# Altium PCB module.PcbDoc
Units mm, origin at the board's own origin, x right, y up, seen from the top; angles counter-clockwise.
Board outline 43.95 x 15 mm, 2 copper layers (Top Layer, Bottom Layer), stack 0.871 mm thick; 26 components, 18 nets, 109 pads, 126 vias.
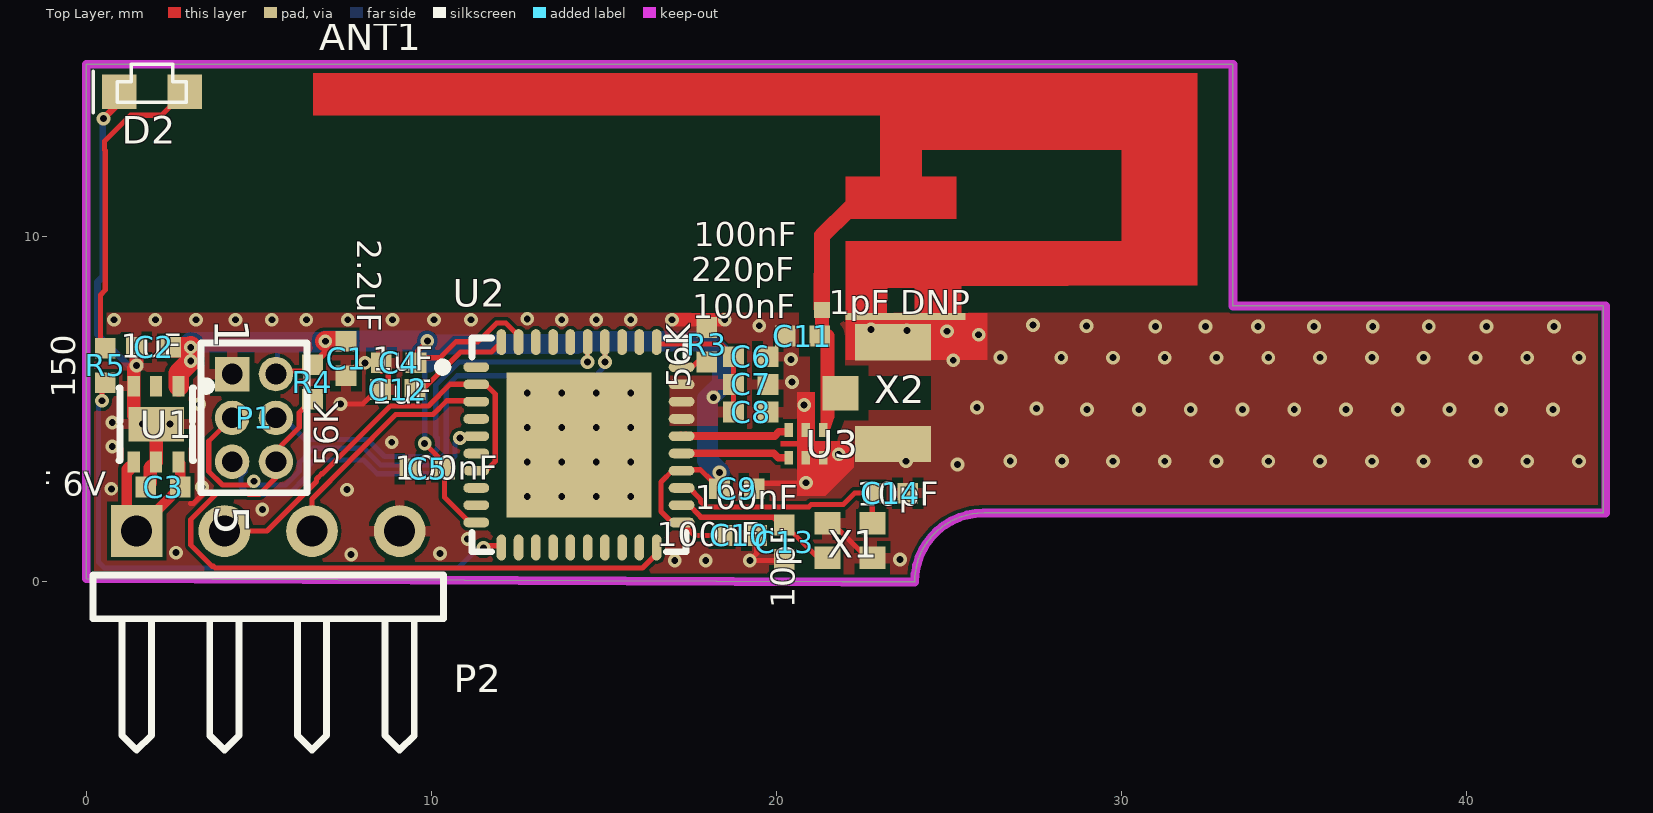
[diagram p0: Top Layer view]
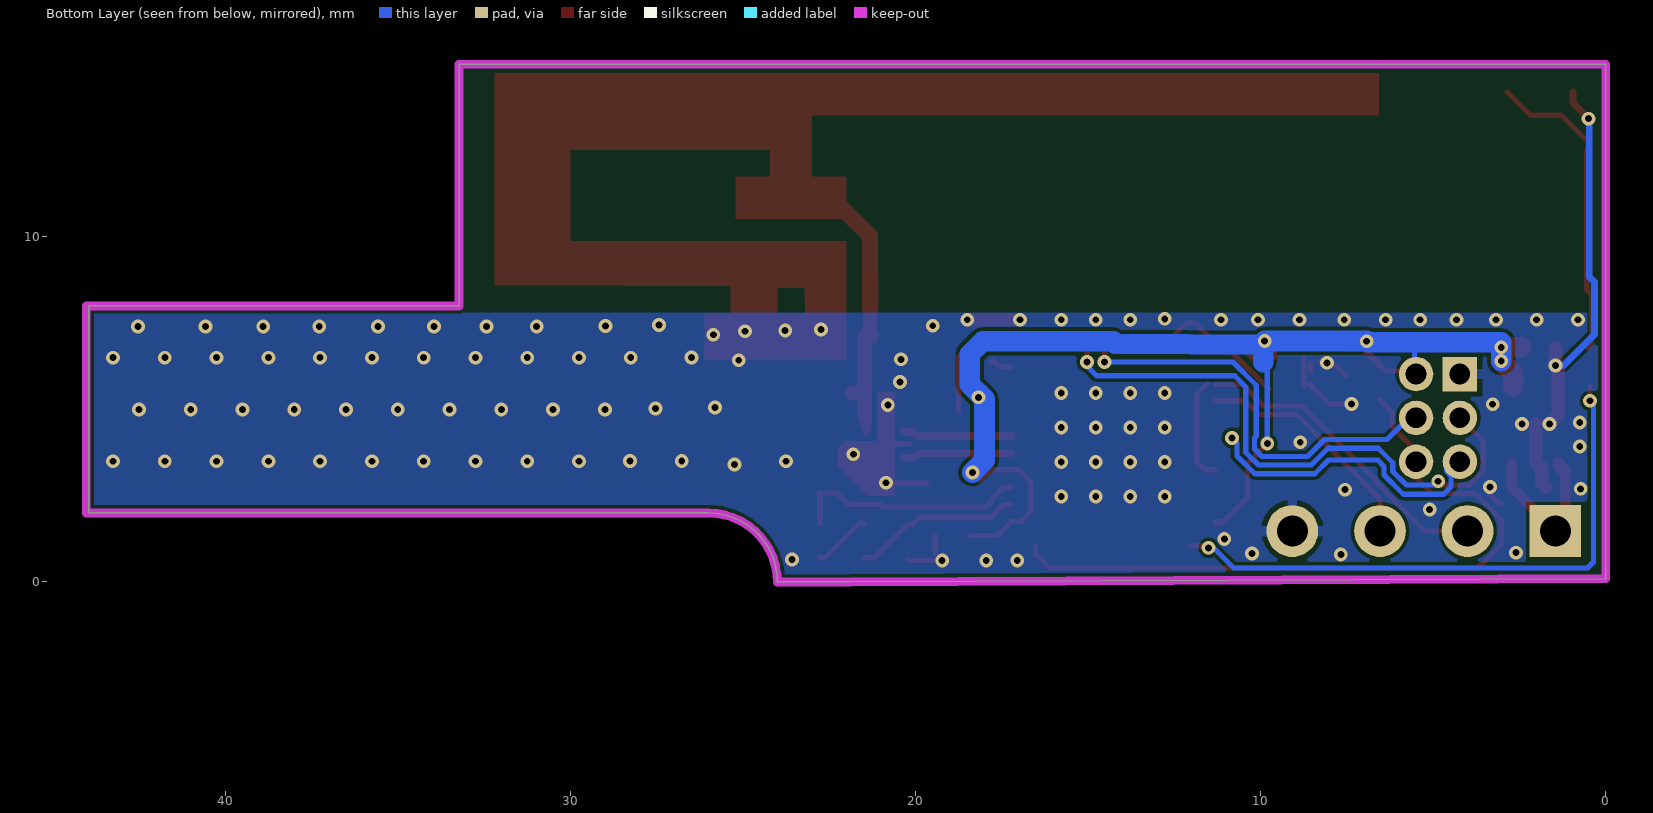
[diagram p1: Bottom Layer view, seen from below]

## Layer stack, top to bottom
Top Solder: solder mask 0.0102, Solder Resist, Dk 3.5
Top Layer: signal copper 0.0356
Dielectric1: core 0.8, FR-4, Dk 4.8
Bottom Layer: signal copper 0.0356
Bottom Solder: solder mask 0.0102, Solder Resist, Dk 3.5

## Board outline
0,0.1 21.9,0 24,0 cw(c26,0) 26,2 43.95,2 43.95,8 33.223,8 33.223,15 0,15

## Design rules (kind name [scope] priority, off if disabled: settings)
AcuteAngle [All] p1 off: minimum=8.80000000000000E+0001 checktracksonly=FALSE
Clearance Clearance_cc2533 [(InNet('GND') AND IsRegion) vs (HasFootprint('QFN50P600X600X100-40L-2') AND InNet('GND'))] p1: gap=1 ignorepadtopadclearanceinfootprint=FALSE except(0: Arc-Hole Track-Hole SMDPad-Hole THPad-Hole Via-Hole Fill-Hole Poly-Hole Region-Hole Text-Hole)
Clearance rfnet [InNet('NetR1_1')   Or InNet('NetANT1_2') vs (InNet('GND') AND NOT HasFootprint('LFB182G45BG2D280'))] p2: gap=0.3 ignorepadtopadclearanceinfootprint=FALSE except(0: Arc-Hole Track-Hole SMDPad-Hole THPad-Hole Via-Hole Fill-Hole Poly-Hole Region-Hole Text-Hole)
Clearance Clearance_balun [HasFootprint('LFB182G45BG2D280')] p3: gap=0.124 ignorepadtopadclearanceinfootprint=FALSE except(0: Arc-Hole Track-Hole SMDPad-Hole THPad-Hole Via-Hole Fill-Hole Poly-Hole Region-Hole Text-Hole)
Clearance Clearance_Ant [(ObjectKind = 'Pad') And (Component = 'ANT1') vs (OnLayer('Keep-Out Layer'))] p4: gap=0 ignorepadtopadclearanceinfootprint=FALSE
Clearance Clearance_Normal [All] p5: gap=0.1 ignorepadtopadclearanceinfootprint=FALSE except(0: Arc-Hole Track-Hole SMDPad-Hole THPad-Hole Via-Hole Fill-Hole Poly-Hole Region-Hole Text-Hole)
ComponentClearance prog_connector [InComponent('P1')] p1: gap=-10 collisioncheckmode=3 verticalgap=-10 showdistances=FALSE
ComponentClearance [All] p2: gap=0.15 collisioncheckmode=3 verticalgap=0.15 showdistances=FALSE
DiffPairsRouting [All] p1: maxlimit=0.254 minlimit=0.254 mostfreqgap=0.254 toplayer_minwidth=0.381 toplayer_maxwidth=0.381 toplayer_prefwidth=0.381 bottomlayer_minwidth=0.381 bottomlayer_maxwidth=0.381 bottomlayer_prefwidth=0.381 maxuncoupledlength=12.7
FabricationTestPointUsage TestPointUsage [All] p1: valid=0 allowmultiple=FALSE
FabricationTestpoint Testpoint [All] p1: side=3 testpointundercomponent=TRUE minsize=1.016 maxsize=2.54 preferedsize=1.524 minholesize=0 maxholesize=1.016 preferedholesize=0.813 testpointgrid=0.025 allowsidetop=TRUE allowsidebottom=TRUE usegrid=TRUE gridtolerance=0
Height [All] p1 off: minheight=0 maxheight=25.4 prefheight=12.7
HoleSize [All] p1: absolutevalues=TRUE maxlimit=6 minlimit=0.2 maxpercent=80.000 minpercent=20.000
MinimumAnnularRing [All] p1: minimumring=0.1
MinimumSolderMaskSliver [All] p1: minsoldermaskwidth=0.2
NetAntennae [All] p1: netantennaetolerance=1
PasteMaskExpansion [All] p1: expansion=-0.05
PlaneClearance [All] p1: clearance=0.3
PlaneConnect [All] p1: planeconnectstyle=Direct reliefexpansion=0.508 reliefentries=4 reliefconductorwidth=0.2 reliefairgap=0.254
PolygonConnect capa-rf [InComponent('C11')] p1: connectstyle=Direct reliefconductorwidth=0.254 reliefentries=4 polygonreliefangle="90 Angle" airgapwidth=0.254
PolygonConnect UFL-connect [HasFootprint('U.FL-R-SMT-1')] p2: connectstyle=Direct reliefconductorwidth=0.254 reliefentries=4 polygonreliefangle="90 Angle" airgapwidth=0.254
PolygonConnect [HasFootprint('QFN50P600X600X100-40L-2')] p3: connectstyle=Direct reliefconductorwidth=0.6 reliefentries=4 polygonreliefangle="90 Angle" airgapwidth=0.1
PolygonConnect ant-connect [InComponent('ANT1')] p4: connectstyle=Direct reliefconductorwidth=0.2 reliefentries=4 polygonreliefangle="90 Angle" airgapwidth=0.254
PolygonConnect PolygonConnect_Via [IsVia] p5: connectstyle=Direct reliefconductorwidth=0.254 reliefentries=4 polygonreliefangle="90 Angle" airgapwidth=0.254
PolygonConnect PolygonConnect_1 [All] p6: connectstyle=Relief reliefconductorwidth=0.3 reliefentries=4 polygonreliefangle="90 Angle" airgapwidth=0.15
RoutingCorners [All] p1: cornerstyle=45-Degree minsetback=1 maxsetback=2.54
RoutingVias [All] p1: holewidth=0.3 width=0.6 viastyle="Through Hole" minholewidth=0.2 minwidth=0.4 maxholewidth=1 maxwidth=4
SMDToCorner [All] p1 off: distance=78740
SMDToPlane [All] p1 off: distance=118110
SilkToSilkClearance [All] p1: silktosilkclearance=0.2
SilkToSolderMaskClearance SilkscreenOverComponentPads [IsPad] p1: minsilkscreentomaskgap=0.2 clearancetoexposedcopper=TRUE
SolderMaskExpansion SolderMaskExpansion_Via [isVia] p1: expansion=-5
SolderMaskExpansion [All] p2: expansion=0.05
ViasUnderSMD [All] p1: allowed=TRUE
Width [All] p1: maxlimit=5 minlimit=0.15 preferedwidth=0.2 minimp=50.000000 maximp=50.000000 favimp=50.000000
16 further rules are at their usual default settings.

## Classes and differential pairs
differential pair RF: +RF_P -RF_N

## Components (designator, comment, footprint, x,y, rotation, side; value= is the part's Value field where it differs from the comment)
ANT1 "Inverted F Antenna" IFA_2 22,7.531 r180 top net-tie
C1 "2.2uF" CAPC1005X05L 7.525,6.475 r270 top
C2 "1uF" CAPC1005X05L 1.95,6.8 r180 top
C3 "1uF 6V" CAPC1005X05L 2.225,2.75 r180 top
C4 "1uF" CAPC1005X05L 9.05,6.35 r180 top
C5 "100nF" CAPC1005X05L 9.881,3.277 r180 top
C6 "100nF" CAPC1005X05L 19.25,6.525 r0 top
C7 "220pF" CAPC1005X05L 19.25,5.725 r0 top
C8 "100nF" CAPC1005X05L 19.25,4.925 r0 top
C9 "100nF" CAPC1005X05L 18.85,2.7 r0 top
C10 "100nF" CAPC1005X05L 18.925,1.35 r0 top
C11 "1pF DNP" CAPC1005X05L 20.75,7.125 r180 top
C12 "1uF" CAPC1005X05L 9.025,5.575 r180 top
C13 "10pF" CAPC1005X05L 20.225,1.15 r270 top
C14 "10pF" CAPC1005X05L 23.3,2.575 r0 top
D2 "27-21SURC/S530-A3" Led-side 1.9,14.2 r0 top
P1 "MHDR2X3" MHDR2X3 4.225,6.025 r270 top
P2 "Header 4H" HDR1X4H 1.46,1.475 r0 top
R3 "56K" RESC1005X04L 17.975,6.875 r270 top
R4 "56K" RESC1005X04L 6.553,5.791 r90 top
R5 "150" RESC1005X04L 0.55,6.275 r270 top
U1 "TPS781330220DRVR" QFN65P200X200X80-6N 2.025,4.575 r180 top
U2 "CC2533F96RHA" QFN50P600X600X100-40L-2 14.275,3.975 r0 top
U3 "LFB182G45BG2D280" LFB182G45BG2D280 20.85,4 r0 top
X1 "ABM11-32.000MHZ-B7G-T" Abracon-ABM11 22.775,1.7 r0 top
X2 "UFL" U.FL-R-SMT-1 23.375,5.475 r270 top

## Footprints (in the part's own frame and the unit in brackets; to place one, negate y for a bottom-side part, rotate by r counter-clockwise, add the part's x,y. Pads: shape width x height; smd on the part's side, far side on the other; paste and mask are expansions set on the pad)
Abracon-ABM11 [mm]
  rect 0.75x0.65 smd: 0(-1.3,0) 0(0,-1) 1(-1.3,-1) 2(0,0)
  body extent -1.65,-1.3 0.35,0.3, height 0.59
CAPC1005X05L [mm]
  rect 0.6x0.6 smd: 1(-0.5,0) 2(0.5,0)
  body extent -0.55,-0.3 0.55,0.3, height 0.6
HDR1X4H [mm] "Connector; Header; 4 Position; Right Angle"
  rect 1.5x1.5 hole 0.9: 1(0,0)
  round 1.5 hole 0.9: 2(2.54,0) 3(5.08,0) 4(7.62,0)
  silkscreen extent -1.27,-6.35 8.89,-1.27, body extent -1.4,-4.65 9.02,0.4, height 3.54
IFA_2 [mm]
  rect 0.46x0.46 smd paste-1000 mask-1000: 1(0.684,-0.347)
  rect 3.48x0.2 smd paste-2539.97 mask-2539.97: 2(-1.738,-0.165)
  Top Layer region: -3.353,-0.23 -3.356,-1.042 -9.552,-1.067 -10.187,-1.067 -10.188,-1.067 -10.188,-1.067 -10.189,-1.068 -10.189,-1.068 -10.189,-1.068 -10.189,-7.215 -10.189,-7.216 -10.188,-7.216 -10.188,-7.217 -10.187,-7.217 -10.187,-7.217 15.416,-7.217 15.417,-7.217 15.417,-7.216 15.418,-7.216 15.418,-7.215 15.418,-7.215 15.418,-6.002 15.418,-6.001 15.417,-6 15.417,-6 15.416,-6 15.416,-6 -1,-6 -1,-4.207 -0.002,-4.207 -0.001,-4.206 0,-4.206 0,-4.206 0,-4.205 0,-4.205 0,-3.507 0.846,-2.661 0.897,-2.586 0.914,-2.498 0.914,-2.498 0.915,-0.36 0.892,-0.26 0.828,-0.18 0.736,-0.135 0.634,-0.135 0.541,-0.18 0.477,-0.26 0.455,-0.36 0.455,-0.36 0.454,-2.402 0.446,-2.41 -0.144,-3 -3.205,-3 -3.206,-3 -3.206,-3 -3.206,-3.001 -3.207,-3.002 -3.207,-3.002 -3.207,-4.205 -3.206,-4.206 -3.206,-4.206 -3.206,-4.206 -3.205,-4.207 -3.205,-4.207 -2.207,-4.207 -2.207,-5 -8,-5 -8,-2.34 -0.002,-2.34 -0.001,-2.34 0,-2.34 0,-2.339 0,-2.338 0,-2.338 0,-0.103 0,-0.103 0,-0.102 -0.001,-0.102 -0.002,-0.102 -0.002,-0.102 -0.102,-0.102 -0.101,-0.23 -0.101,-0.229 -0.102,-0.229 -0.102,-0.228 -0.103,-0.228 -0.103,-0.228 -1.193,-0.228 -1.193,-0.228 -1.194,-0.229 -1.194,-0.229 -1.194,-0.23 -1.194,-0.23 -1.207,-1 -2,-1 -2.006,-0.23 -2.006,-0.229 -2.007,-0.229 -2.007,-0.228 -2.008,-0.228 -2.008,-0.228 -2.692,-0.229 -3.352,-0.228 -3.352,-0.228 -3.353,-0.229 -3.353,-0.229 -3.353,-0.23
Led-side [mm]
  rect 1x1 smd: 1(-0.95,0) 2(0.95,0)
  silkscreen extent -1.7,-0.6 1,0.8, body extent -0.9,-0.3 0.9,0.8, height 0.55
LFB182G45BG2D280 [mm] "Murata Balun"
  rect 0.25x0.4 smd mask+0: 1(0.5,0.4) 2(0,0.4) 3(-0.5,0.4) 4(-0.5,-0.4) 5(0,-0.4) 6(0.5,-0.4)
  Top Layer region: -0.724,0.075 1.202,0.075 1.382,-0.106 1.382,-0.677 -0.215,-0.677 -0.236,-0.664 -0.251,-0.641 -0.251,-0.15 -0.251,-0.069 -0.333,-0.067 -0.721,-0.067
  Top Layer region: -0.25,1.499 -0.25,0.027 -0.236,0.013 0.242,0.013 0.25,0.021 0.25,1.499 0.251,1.5
  Top Layer region: -0.251,-0.395 -0.251,-1.5 -0.25,-1.5 -0.249,-1.498 0.561,-1.498 1.382,-0.677
  body extent -0.85,-0.45 0.85,0.45, height 0.7
MHDR2X3 [mm] "Connector; Header; 3x2 Position"
  rect 1x1 hole 0.6: 1(0,0)
  round 1 hole 0.6: 2(0,1.27) 3(1.27,0) 4(1.27,1.27) 5(2.54,0) 6(2.54,1.27)
  silkscreen extent -0.9,-0.9 3.44,2.17
QFN50P600X600X100-40L-2 [mm] "QFN, 40-Leads, Body 6.2x6.2mm (max), Pitch 0.50mm, IPC High Density"
  rect 4.2x4.2 smd paste-1.5 mask+0: 0(0,0)
  oval 0.75x0.28 smd paste-0.025 mask+0.05: 1(-2.975,2.25) 2(-2.975,1.75) 3(-2.975,1.25) 4(-2.975,0.75) 5(-2.975,0.25) 6(-2.975,-0.25) 7(-2.975,-0.75) 8(-2.975,-1.25) 9(-2.975,-1.75) 10(-2.975,-2.25) 21(2.975,-2.25) 22(2.975,-1.75) 23(2.975,-1.25) 24(2.975,-0.75) 25(2.975,-0.25) 26(2.975,0.25) 27(2.975,0.75) 28(2.975,1.25) 29(2.975,1.75) 30(2.975,2.25)
  oval 0.28x0.75 smd paste-0.025 mask+0.05: 11(-2.25,-2.975) 12(-1.75,-2.975) 13(-1.25,-2.975) 14(-0.75,-2.975) 15(-0.25,-2.975) 16(0.25,-2.975) 17(0.75,-2.975) 18(1.25,-2.975) 19(1.75,-2.975) 20(2.25,-2.975) 31(2.25,2.975) 32(1.75,2.975) 33(1.25,2.975) 34(0.75,2.975) 35(0.25,2.975) 36(-0.25,2.975) 37(-0.75,2.975) 38(-1.25,2.975) 39(-1.75,2.975) 40(-2.25,2.975)
  silkscreen extent -4.07,-3.1 3.1,3.1, body extent -3.08,-3.08 3.08,3.08, height 1
QFN65P200X200X80-6N [mm] "QFN, 6-Leads, Body 2.1x2.1mm (max), Pitch 0.65mm, IPC Medium Density"
  rect 0.35x0.6 smd paste-0.05 mask+0.07: 1(-0.65,-1.1) 2(0,-1.1) 3(0.65,-1.1) 4(0.65,1.1) 5(0,1.1) 6(-0.65,1.1)
  rect 1.6x1 smd paste-0.1: 7(0,0)
  silkscreen extent -1.58,-1.22 1.07,1.05, body extent -1.05,-1.05 1.05,1.05, height 0.8
RESC1005X04L [mm] "Chip Resistor, Body 1.1x0.5mm, IPC High Density, EIA 0402"
  rect 0.6x0.6 smd: 1(-0.5,0) 2(0.5,0)
  body extent -0.55,-0.3 0.55,0.3, height 0.4
U.FL-R-SMT-1 [mm]
  rect 1.05x2.2 smd paste-5: 0(-1.475,0) 0(1.475,0)
  rect 1x1.05 smd paste-5: 1(0,-1.525)
  body extent -1.5,-1.5 1.49,1.51, height 1.25

## Part data
ANT1: library part PIF_Antenna
C1: library part 220nF[[/\]]0603[[/\]]1, "Capacitor"
C2 C3 C4 C12: library part 1uF[[/\]]0402[[/\]]1, "Capacitor"
C5 C6 C7 C8 C9 C10: library part 100nF[[/\]]0402[[/\]]1, "Capacitor"
C11 C13 C14: library part 15pF[[/\]]0402[[/\]]1, "Capacitor"
D2: library part LED, "SMD Red led right angle mount 2V@20ma 57mcd"
P1: "Header, 3-Pin, Dual row"
P2: "Header, 4-Pin, Right Angle"
R3 R4 R5: library part 0R[[/\]]0402[[/\]]1, "Resistor"
U1: library part TPS781, "150mA LDO TI"
U2: library part cc2533, "A True System-on-Chip Solution for 2.4-GHz IEEE 802.15.4"
U3: library part 2450BM15A0002, "Balun for CC253x"
X1: "32Mhz Crystal, 15ppm"
X2: library part U.FL-R-SMT-1

## Via types
v1: diameter 0.4, hole 0.2, Top Layer to Bottom Layer, tented both sides, 110 vias
v2: diameter 0.4, hole 0.2, Top Layer to Bottom Layer, tented bottom, 16 vias

## Nets (pads, with @x,y where several pads share a name; then routed paths per layer and width w, separated by ;. In a path a pad name is that pad's centre, name@x,y a point inside that pad or via, vN(x,y) a via of type N, cw(c..) or ccw(c..) an arc to the next point about the centre after c; other vN are vias at no path point)
3.3V: C1.1 C2.1 C4.1 C5.1 C6.1 C7.1 C8.1 C9.1 C10.1 P1.2 R4.2 U1.1 U2.10 U2.21 U2.24 U2.27 U2.28 U2.29 U2.31 U2.39 | length 43.5
  Top Layer w0.15: P1.2@5.537,6.198 5.621,6.113 6.375,6.113 R4.2 ; C4.1@9.593,6.502 9.593,6.698 v1(9.881,6.985) ; C4.1@9.75,6.5 10.251,6.5 10.714,6.963 11.318,6.963 11.335,6.98 ; v1(9.804,4.013) 10.381,3.437 C5.1 10.381,2.454 11.105,1.73 U2.10@11.325,1.73 ; U2.10@11.325,1.74 11.13,1.74 11.12,1.75 U2.10@11.325,1.75 ; 11.353,6.963 11.895,7.505 12.155,7.505 12.525,7.135 12.525,6.955 U2.39 ; U2.31@16.525,6.93 16.555,6.9 18.375,6.9 C6.1 C7.1 C8.1 ; C9.1@18.112,2.937 17.8,3.25 17.005,3.25 16.65,2.895 16.65,2.044 16.944,1.75 17.225,1.75 U2.21 17.625,1.35 C10.1
  Top Layer w0.2: R4.2 6.925,6.663 v1(6.925,6.975)
  Top Layer w0.6: C2.1 v1(3.025,6.8) v1@3.025,6.825 ; U1.1 2.675,6.05 v1(3.025,6.4) ; v1(6.925,6.975) C1.1
  Bottom Layer w0.15: P1.2@5.537,6.198 5.537,6.95 ; v1@9.779,4.115 9.804,4.14 9.804,6.383 9.847,6.426
  Bottom Layer w0.6: v1(3.025,6.4) v1(3.025,6.8) ; v1@3.025,6.95 5.537,6.95 6.9,6.95 v1(6.925,6.975) ; v1@6.925,6.985 v1(9.881,6.985) v1@9.891,6.975 ; 9.925,6.375 9.925,6.875 9.881,6.875 14.201,6.9 ; 14.277,6.975 18.048,6.975 18.426,6.597 18.426,5.726 18,5.3 18,3.525 v1(18.35,3.175)
  other v1: 18.176,5.35
DBG_C: P1.3 U2.34 | length 17.3
  Top Layer w0.15: P1.3 3.55,4.08 3.55,3.205 3.945,2.81 4.743,2.81 v1(4.853,2.92) ; v1(15.026,6.375) U2.34@15.025,6.93
  Bottom Layer w0.15: v1(4.853,2.92) 4.963,2.81 5.775,2.81 6.17,3.205 6.17,3.453 6.592,3.875 8.046,3.875 8.533,3.388 10.063,3.388 10.429,3.754 10.429,5.654 10.75,5.975 14.75,5.975 15.026,6.251 v1(15.026,6.375)
DBG_D: P1.4 U2.35 | length 12.4
  Top Layer w0.15: v1@14.525,6.345 U2.35 U2.35@14.525,6.955
  Bottom Layer w0.15: P1.4@5.537,4.928 6.34,4.125 8.15,4.125 8.637,3.638 9.96,3.638 10.179,3.858 10.179,4.169 10.125,4.223 10.125,5.704 10.796,6.374 v1(14.526,6.375)
GND: ANT1.2 C1.2 C2.2 C3.2 C4.2 C5.2 C6.2 C7.2 C8.2 C9.2 C10.2 C11.2 C12.2 C13.2 C14.2 D2.1 P1.1 P2.4 R3.1 U1.3 U1.5 U1.7 U2.0 U3.2 U3.5 U3.6 X1.0 X2.0 | length 23.8
  Top Layer w0.15: 3.025,2.275 3.097,2.275 3.35,2.528 v1(3.35,2.75) ; v1(7.366,5.156) 8.009,5.156 C12.2@8.593,5.74 ; C1.2 7.9,6.35 v1(8.075,6.35) 8.025,6.4 8.275,6.4 C4.2@8.279,6.396 ; C4.2@8.55,6.101 C4.2 ; C12.2@8.75,5.675 C4.2@8.75,6.5 ; C10.2 19.425,0.825 19.228,0.628 19.228,0.686 19.225,0.683 v1(19.225,0.625) 20.2,0.625 C13.2 ; 19.663,2.862 21.222,2.862 ; X1.0@21.475,1.7 21.625,1.7 22.625,0.7 X1.0@22.775,0.7
  Top Layer w0.2: v1(0.5,13.425) 0.95,13.875 D2.1
  Top Layer w0.4: C2.2 v1(1.45,6.275) 1.375,6.2 U1.3 1.375,4.825 v1(1.625,4.575) ; C3.2 1.85,2.875 1.85,3.3 U1.5 U1.7 ; v1(16.975,7.6) v1(18.5,7.6)
  Bottom Layer w0.2: v1(0.5,13.425) 0.475,13.4 0.475,8.841 0.327,8.693 0.327,7.173 1.225,6.275
  other v1: 17.05,0.625 17.95,0.625 23.575,0.65 7.675,0.8 10.25,0.825 2.6,0.85 11.05,1.25 5.1,2.1 7.55,2.675 0.725,2.7 20.85,2.875 25.248,3.404 23.75,3.5 29.75,3.5 31.25,3.5 32.75,3.5 34.25,3.5 35.75,3.5 37.25,3.5 38.75,3.5 40.25,3.5 41.75,3.5 43.25,3.5 26.772,3.505 28.27,3.505 21.8,3.7 0.75,3.925 8.85,4.05 2.425,4.575 0.75,4.625 29,5 30.5,5 32,5 33.5,5 35,5 36.5,5 38,5 39.5,5 41,5 42.5,5 27.534,5.029 25.806,5.055 20.801,5.125 3.275,5.15 20.447,5.791 25.121,6.426 20.422,6.452 28.25,6.5 29.75,6.5 31.25,6.5 32.75,6.5 34.25,6.5 35.75,6.5 37.25,6.5 38.75,6.5 40.25,6.5 41.75,6.5 43.25,6.5 26.492,6.502 25.857,7.163 24.943,7.264 23.774,7.29 22.733,7.315 30.975,7.4 32.425,7.4 33.95,7.4 35.575,7.4 37.275,7.4 38.9,7.4 40.575,7.4 42.525,7.4 19.5,7.425 28.981,7.417 27.432,7.442 0.8,7.6 2,7.6 3.175,7.6 4.325,7.6 5.375,7.6 6.375,7.6 7.575,7.6 8.875,7.6 10.075,7.6 11.15,7.6 13.775,7.6 14.775,7.6 15.775,7.6 12.775,7.625
  other v2: 12.775,2.475 13.775,2.475 14.775,2.475 15.775,2.475 12.775,3.475 13.775,3.475 14.775,3.475 15.775,3.475 12.775,4.475 13.775,4.475 14.775,4.475 15.775,4.475 12.775,5.475 13.775,5.475 14.775,5.475 15.775,5.475
LED0: R5.2 U2.11 | length 17.1
  Top Layer w0.15: v1(0.45,5.25) R5.2@0.45,5.675 ; v1(11.506,0.991) 11.506,1.05 U2.11@12.025,1.05
  Bottom Layer w0.15: v1(0.45,5.25) 0.35,5.15 0.35,0.575 0.522,0.403 10.778,0.403 v1@11.425,1.05
NetANT1_2: ANT1.1 C11.1 U3.1 X2.1 | length 3.7
  Top Layer w0.4: C11.1 C11.1@21.316,7.125 ; ANT1.1 C11.1@21.316,7.125 ; X2.1@21.474,5.475 21.474,7.125 C11.1@21.316,7.125 ; 21.475,4.8 21.475,5.475 X2.1
NetC12_1: C12.1 U2.40 | length 2.8
  Top Layer w0.15: C12.1@9.765,5.59 10.838,6.663 11.738,6.663 U2.40
NetC13_1: C13.1 U2.22 X1.1 | length 4.9
  Top Layer w0.15: U2.22@17.225,2.25 17.445,2.25 17.8,1.895 17.8,1.875 19.893,1.875 20.093,1.675 20.225,1.675 21.2,0.7 X1.1
NetC14_1: C14.1 U2.23 X1.2 | length 6.9
  Top Layer w0.15: U2.23@17.225,2.75 17.445,2.75 17.8,2.395 17.8,2.332 17.957,2.175 20.932,2.175 21.007,2.25 21.943,2.25 22.268,2.575 C14.1 22.775,2.55 X1.2
NetD2_2: D2.2 R5.1 | length 9
  Top Layer w0.15: R5.1@0.5,6.775 0.406,6.869 0.406,8.314 0.55,8.458 0.55,12.506 0.531,12.525 0.531,12.588 0.531,12.712 0.531,12.775 1.281,13.525 2.175,13.525 D2.2
NetR3_2: R3.2 U2.30 | length 0.7
  Top Layer w0.15: U2.30@17.225,6.23 17.555,6.23 17.75,6.425 R3.2@17.826,6.349
RESET: P1.6 R4.1 U2.20 | length 20.7
  Top Layer w0.15: R4.1 6.17,4.908 6.17,4.475 5.495,3.8 P1.6 5.495,3.031 5.009,2.545 4.698,2.545 4.683,2.56 3.777,2.56 3.025,1.808 3.025,1.071 3.639,0.457 3.683,0.457 3.738,0.403 16.118,0.403 16.525,0.81 U2.20@16.525,1.03
  Bottom Layer w0.15: P1.6@5.537,3.658 P1.6@5.537,3.74
RF_N: U2.26 U3.3 | length 3.2
  Top Layer w0.22: U2.26@17.225,4.23 17.367,4.23 19.951,4.23 20.071,4.35 20.3,4.35 U3.3
  Top Layer w0.25: U2.26@17.225,4.225 U2.26@17.225,4.23 ; U2.26@17.367,4.23 U2.26@17.373,4.236
RF_P: U2.25 U3.4 | length 3.2
  Top Layer w0.22: U2.25@17.225,3.73 17.23,3.735 19.915,3.735 20.05,3.6 U3.4
SCL: P2.2 U2.2 U2.7 | length 12.1
  Top Layer w0.15: P2.2 5.232,1.475 6.67,2.913 6.67,2.984 6.823,3.137 6.844,3.137 8.807,5.1 9.911,5.1 10.541,5.73 U2.2@11.325,5.73 ; U2.7@11.325,3.25 11.607,3.25 11.85,3.493 11.85,5.445 U2.2@11.545,5.75
SDA: P2.3 U2.3 | length 6.9
  Top Layer w0.15: P2.3 6.54,2.409 7.627,3.496 7.627,3.51 8.968,4.85 10.045,4.85 10.445,5.25 U2.3@11.325,5.25
UART_TX: P1.5 U2.5 | length 8.9
  Bottom Layer w0.15: P1.5 4.54,3.485 4.603,3.422 4.603,3.2 4.478,3.075 4.478,2.764 4.698,2.545 5.863,2.545 6.42,3.102 6.42,3.35 6.604,3.534 8.034,3.534 8.43,3.138 10.167,3.138 10.679,3.651 10.679,4.029 v1(10.826,4.175)
VBAT: C3.1 P2.1 U1.4 U1.6 | length 4.5
  Top Layer w0.3: P2.1@1.175,1.76 1.175,3.154 ; P2.1@1.6,1.625 C3.1 U1.6@2.725,3.425 ; 1.175,3.154 1.375,3.354 U1.4 1.175,3.275 1.175,3.154
pads on no net: U1.2 U2.1 U2.4 U2.6 U2.8 U2.9 U2.12 U2.13 U2.14 U2.15 U2.16 U2.17 U2.18 U2.19 U2.32 U2.33 U2.36 U2.37 U2.38

## Polygon pours and split planes (outlines as drawn)
3.3V on Top Layer "Bot Layer-GND" (solid, remove dead copper, pour order 4): 16.875,5.969 18,5.969 19.25,5.969 19.25,4.525 16.9,4.525 16.875,4.549
GND on Top Layer "Top Layer-GND" (solid, remove dead copper, pour order 14): -1.5,7.8 50.8,7.8 53.8,4.772 52.3,3.258 52.3,-2.192 -0.8,-2.192 -1.7,-3.1
GND on Bottom Layer "Bot Layer-GND" (solid, remove dead copper, pour order 16): -3.7,7.8 51.2,7.8 58.8,0.135 54.7,-4 44.9,-4 -1.1,-4 -4.3,-0.773

## Keep-outs
Keep-Out Layer:
  lines w0.254: 0,0.1 21.9,0 24,0 cw(c26,0) 26,2 44.025,2 44.025,8 33.223,8 33.223,15 0,15 0,0.1

## Other copper
Top Layer:
  rectangle net GND: 21.996,6.426 26.111,7.798
  region net NetANT1_2: 21.275,4.85 21.275,4.4 21.475,4.2 21.65,4.7
  pour cut-out: 22.428,5.969 24.486,5.969 24.486,4.978 22.428,4.978
  pour cut-out: 11.7,6.575 16.9,6.575 16.9,1.375 11.7,1.375

## Silkscreen, mask and mechanical layers (free items; w line width, h text height)
Top Solder:
  text "LSRO1 Mobsya TOP" at 31.425,2.475 h1.4
Bottom Solder:
  text "12.11.15-Rev2.21-PR-MB" at 39.116,2.337 h1.4
  text "BOT" at 42.342,2.311 h1.4
Outline:
  lines w0.254: 0,0 21.9,0 24,0 cw(c26,0) 26,2 43.95,2 43.95,8 33.223,8 33.223,15 0,15 0,0
Drill Drawing:
  text ".Legend" at -39.9,-42.7 h2

## Text inside footprints (layer, text, board x,y; h text height)
P1: Top Overlay "5" at 3.717,2.225 h1 r270; Top Overlay "1" at 3.717,7.625 h1 r270